# Altium PCB [PCB]-WS2805-RGBCCT-LED-DRV_2025-10-18.pcbdoc (part 2 of 2)
Units mm, origin at the board's own origin, x right, y up, seen from the top; angles counter-clockwise.
Board outline 183.91 x 132.1 mm, 2 copper layers (Top Layer, Bottom Layer); 84 components, 65 nets, 282 pads, 200 vias.
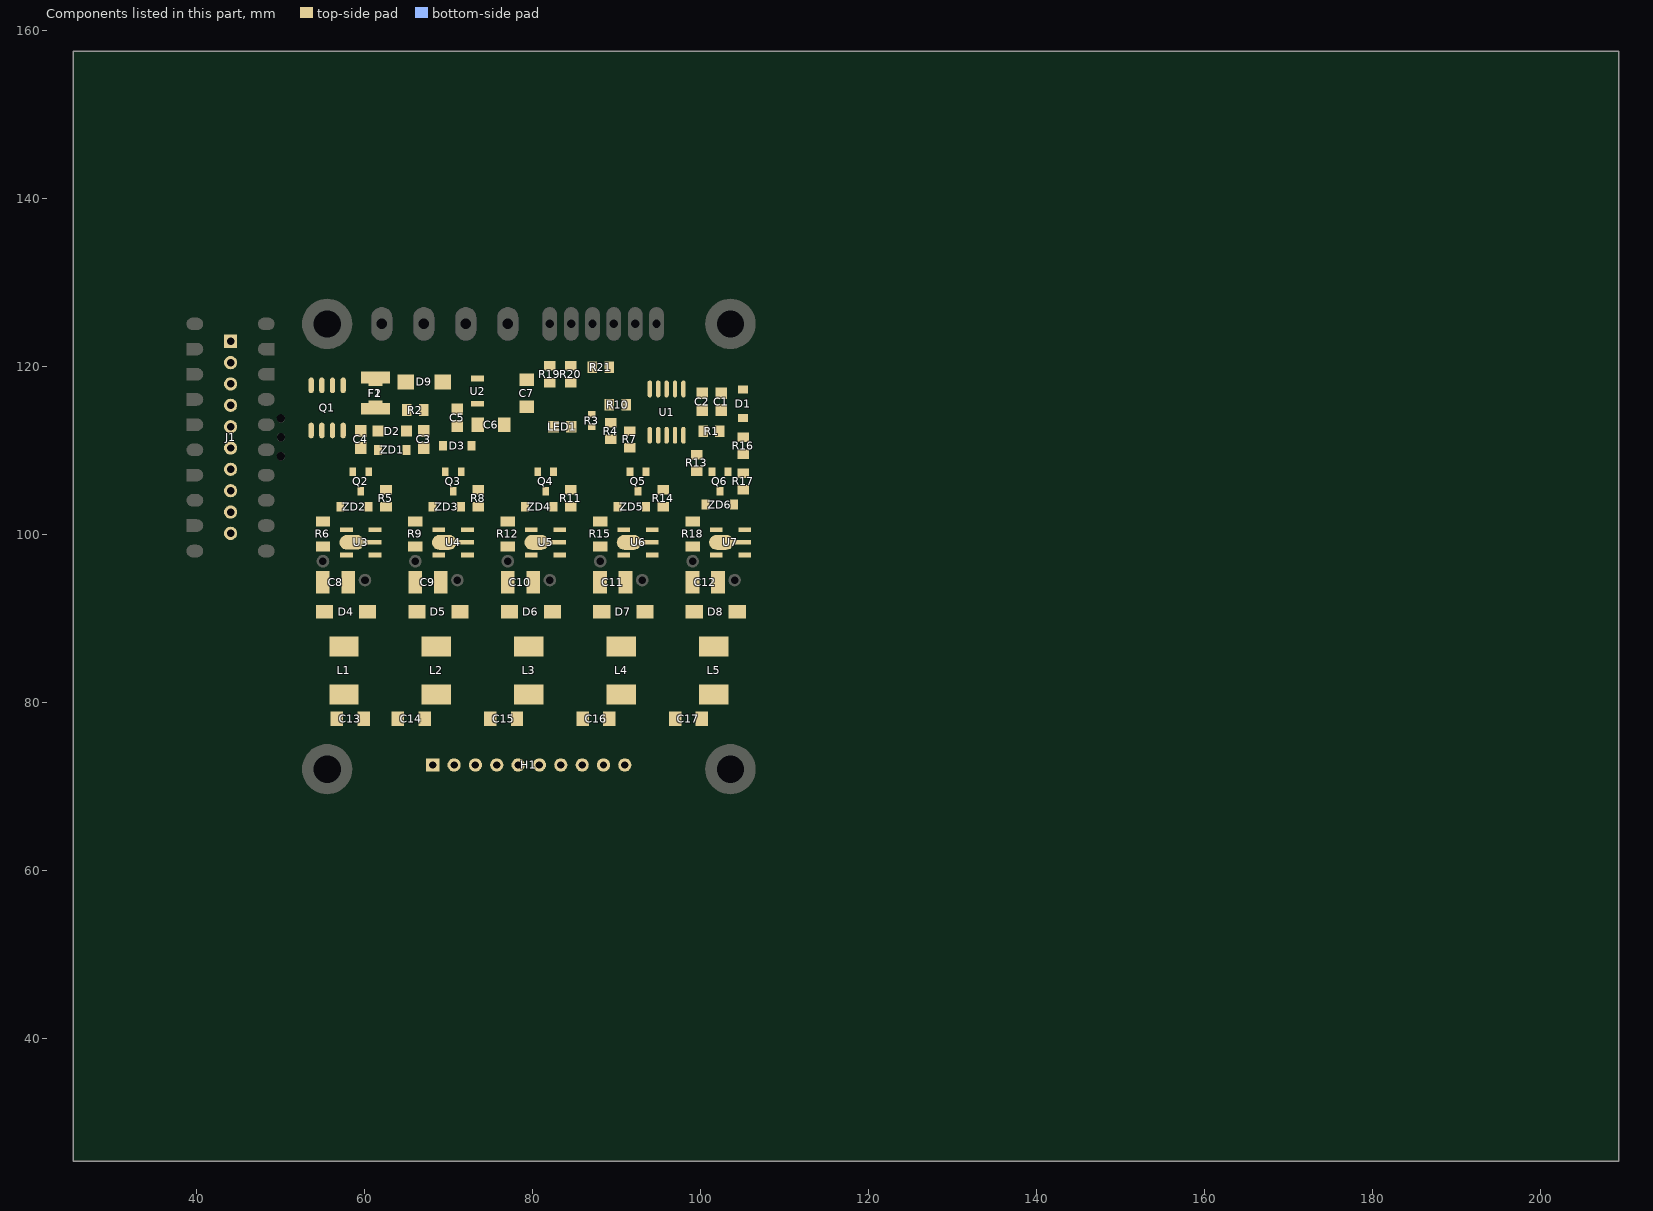
[diagram p2: the components of this part, seen from the top]

## Other copper
Top Layer:
  region net R_PWM: 94.057,110.809 93.738,112.255 93.101,111.693 93.101,110.943
  region net GND: 81.123,99.946 81.122,98.186 82.622,98.565 82.623,99.565
  region net GND: 103.123,99.946 103.122,98.186 104.622,98.565 104.623,99.565
  region net GND: 92.123,99.946 92.122,98.186 93.622,98.565 93.623,99.565
  region net GND: 70.123,99.945 70.122,98.185 71.622,98.565 71.623,99.565
  region net GND: 59.123,98.187 59.122,99.947 60.622,99.567 60.623,98.567
  region net +5V: 95.675,125.442 94.882,123.071 97.175,121.985 97.175,123.399
  region net +5V: 95.675,124.817 94.181,123.323 96.287,123.067 96.287,124.067
  region net DO1: 88.055,123.92 86.305,123.963 86.642,122.454 87.642,122.43
  region net DO1: 88.055,126.192 88.055,123.942 89.72,124.442 89.72,125.692
  region net DO1: 88.845,123.942 88.845,126.192 87.18,125.692 87.18,124.442
  region net C9: 48.104,97.275 48.604,98.775 46.135,100.299 44.254,98.889
  region net C8: 48.101,100.315 48.601,101.815 45.859,103.133 43.87,101.641
  region net C1: 48.602,121.317 48.102,122.817 43.869,121.491 45.858,119.999
  region net C0: 48.604,124.316 48.104,125.816 44.225,124.225 46.114,122.808
  region net C0: 40.1,125.817 39.6,124.317 42.089,122.809 43.978,124.225
  region net C1: 40.102,122.818 39.602,121.318 42.344,120 44.334,121.492
  region net C8: 39.602,101.816 40.102,100.316 44.334,101.642 42.345,103.134
  region net C9: 39.6,98.777 40.1,97.277 43.95,98.889 42.069,100.3
  region net DI2: 85.515,123.942 83.765,123.942 84.14,122.442 85.14,122.442
  region net DI1: 82.975,123.942 81.225,123.942 81.6,122.442 82.6,122.442
  region net B_VCC: 75.75,78.931 74.265,77.203 75.929,76.262 76.746,77.213
  region net R17_1: 105.788,106.751 104.411,107.883 103.895,106.851 104.488,106.363
  region net R17_2: 105.788,104.751 104.411,104.751 104.701,103.251 105.703,103.251
  region net +5V: 105.788,112.133 105.788,111.001 105.801,111.243 105.801,111.993
  region net R14_1: 94.911,105.883 94.911,104.751 93.411,104.706 93.411,105.708
  region net R14_2: 94.911,102.751 94.911,103.883 93.543,103.817 93.543,102.817
  region net W1_PWM: 98.911,108.083 98.911,106.951 97.786,107.092 97.786,107.842
  region net Q4_3: 83.911,105.883 83.911,104.751 82.411,104.707 82.411,105.708
  region net U5_3: 83.911,102.751 83.911,103.883 82.542,103.817 82.542,102.817
  region net B_PWM: 91.766,116.155 90.778,114.778 91.598,114.54 92.085,115.114
  region net +5V: 89.766,114.778 88.634,114.778 88.848,113.317 89.848,113.351
  region net R5_1: 61.911,105.883 61.911,104.751 60.411,104.706 60.411,105.708
  region net R5_2: 61.911,102.751 61.911,103.883 60.543,103.817 60.543,102.817
  region net R_PWM: 90.038,110.751 90.038,111.883 90.788,111.568 90.788,111.068
  region net R_PWM: 88.661,111.883 88.661,110.751 87.536,110.943 87.536,111.693
  region net +5V: 90.038,113.883 88.661,112.751 90.45,112.28 91.314,112.99
  region net +5V: 88.661,113.883 90.038,113.883 89.706,115.383 88.704,115.383
  region net LED1_1: 86.668,112.41 86.668,113.217 85.543,113.192 85.543,112.442
  region net GND: 66.534,114.128 67.666,114.128 67.601,112.628 66.601,112.628
  region net D2_1: 65.618,114.128 64.534,115.505 64.082,114.26 64.552,113.663
  region net C0: 43.315,122.21 44.89,123.784 41.891,125.241 40.32,123.67
  region net C0: 43.315,123.784 44.89,122.21 47.884,123.67 46.313,125.241
  region net D2_1: 61,111.667 61,112.967 59.5,112.816 59.5,111.816
  region net D2_1: 62.3,112.967 61,111.667 62.564,111.11 63.286,111.832
  region net GND: 65.7,112.967 65.7,111.667 67.101,111.816 67.101,112.816
  region net +5V: 104.525,117.734 105.675,117.734 105.6,117.817 104.6,117.817
  region net +5V: 80.214,118.813 78.486,117.667 79.967,116.85 80.805,117.405
  region net GND: 66.425,111.612 66.425,113.022 65.049,112.816 65.049,111.816
  region net GND: 66.425,113.022 67.775,113.022 67.601,114.522 66.601,114.522
  region net U1_10: 99.575,114.112 100.925,114.112 100.751,112.612 99.751,112.612
  region net U1_10: 99.575,115.522 99.575,114.112 98.45,114.443 98.45,115.193
  region net GND: 99.575,116.112 99.575,117.522 98.506,117.192 98.506,116.442
  region net GND: 100.925,117.522 100.925,116.112 102.425,116.317 102.425,117.317
  region net R1_1: 101.825,114.112 103.175,114.112 102.999,112.612 101.999,112.612
  region net GND: 101.825,116.112 101.825,117.522 100.325,117.317 100.325,116.317
  region net R_VCC: 57.5,78.931 56.015,77.203 57.747,75.766 58.727,76.907
  region net R5_2: 61.017,103.892 61.017,102.742 62.517,102.817 62.517,103.817
  region net +5V: 90.911,111.751 92.288,112.883 90.498,113.353 89.634,112.643
  region net W2_PWM: 102.9,107.967 103.7,107.967 103.674,108.544 102.924,108.544
  region net R17_1: 101.95,105.667 102.75,104.667 103.47,105.567 103.002,106.153
  region net R5_1: 59.2,105.667 60,104.667 61.832,104.779 61.062,105.741
  region net R17_2: 104.517,104.142 104.517,102.992 105.183,103.081 105.186,104.081
  region net GND: 100.182,104.142 101.133,102.992 101.435,104.981 100.607,105.983
  region net U4_3: 72.017,103.892 72.017,102.742 73.517,102.817 73.517,103.817
  region net Q3_3: 72.911,105.883 72.911,104.751 71.411,104.707 71.411,105.708
  region net U4_3: 72.911,102.751 72.911,103.883 71.544,103.817 71.544,102.817
  region net W2_GND: 103.35,79.792 99.85,82.142 99.308,80.444 101.25,78.85
  region net W1_GND: 92.35,79.792 88.85,82.142 88.308,80.543 90.249,78.949
  region net B_GND: 81.35,79.792 77.85,81.735 77.486,80.267 79.103,79.055
  region net G_GND: 70.35,79.792 66.85,82.142 66.309,80.444 68.25,78.85
  region net VCC: 68.932,109.992 68.932,111.142 67.703,111.066 67.703,110.066
  region net U5_3: 84.048,100.853 82.547,100.853 82.924,101.978 83.674,101.978
  region net R14_2: 95.048,100.853 93.547,100.853 93.922,101.978 94.672,101.978
  region net U4_3: 73.048,100.852 71.548,100.852 71.923,101.977 72.673,101.977
  region net R5_2: 62.048,100.854 60.548,100.854 60.922,101.979 61.672,101.979
  region net D2_1: 58.925,111.612 58.925,113.022 57.95,112.816 57.95,111.816
  region net D2_1: 60.275,113.022 60.275,111.612 61.65,111.816 61.65,112.816
  region net W1_PWM: 93.95,107.967 93.95,106.967 95.075,107.092 95.075,107.842
  region net R14_1: 92.2,105.667 93,104.667 94.831,104.779 94.062,105.741
  region net Q4_3: 81.2,105.667 82,104.667 83.832,104.779 83.062,105.741
  region net G_PWM: 71.95,107.967 71.95,106.967 73.075,107.191 73.075,107.941
  region net Q3_3: 70.2,105.667 71,104.667 72.832,104.779 72.062,105.741
  region net R14_2: 94.017,103.891 94.017,102.741 95.517,102.817 95.517,103.817
  region net U5_3: 83.017,103.892 83.017,102.742 84.517,102.817 84.517,103.817
  region net VCC: 61.183,109.493 61.183,110.643 59.683,110.568 59.683,109.568
  region net D2_1: 64.568,109.493 65.518,110.643 64.105,111.288 63.465,110.513
  region net U1_7: 88.584,120.604 89.717,119.276 89.895,120.315 89.338,120.827
  region net DO1: 86.584,120.604 87.716,120.604 87.643,122.104 86.643,122.104
  region net U1_8: 85.288,117.501 85.288,118.634 86.413,118.442 86.413,117.692
  region net DI2: 83.911,120.634 85.288,120.634 85.14,122.134 84.14,122.134
  region net U1_9: 81.411,117.501 82.788,117.501 82.475,117.317 81.725,117.317
  region net DI1: 81.411,120.634 82.788,120.634 82.6,122.134 81.6,122.134
  region net GND: 81.899,112.117 81.899,113.517 80.774,113.191 80.774,112.441
  region net LED1_1: 85.3,113.517 85.3,112.117 86.425,112.442 86.425,113.192
  region net GND: 99.92,116.442 99.919,117.192 99.569,117.192 99.57,116.442
  region net GND: 100.581,117.192 100.58,116.442 100.93,116.317 100.931,117.317
  region net GND: 102.169,116.442 102.169,117.192 101.819,117.317 101.819,116.317
  region net +5V: 95.091,123.192 95.091,123.942 95.441,124.067 95.441,123.067
  region net DO1: 87.516,123.237 86.766,123.235 86.641,122.885 87.641,122.887
  region net GND: 103.019,98.69 103.018,99.44 102.668,99.565 102.669,98.565
  region net GND: 103.681,99.44 103.68,98.69 104.03,98.565 104.031,99.565
  region net GND: 102.864,99.44 102.863,98.69 103.213,98.565 103.214,99.565
  region net GND: 105.518,98.69 105.518,99.44 105.167,99.565 105.168,98.565
  region net GND: 105.273,99.44 105.272,98.69 105.622,98.565 105.623,99.565
  region net GND: 104.612,98.69 104.611,99.44 104.261,99.565 104.262,98.565
  region net GND: 92.019,98.69 92.018,99.44 91.668,99.565 91.669,98.565
  region net GND: 92.68,99.44 92.68,98.69 93.029,98.565 93.031,99.565
  region net GND: 91.864,99.44 91.863,98.69 92.213,98.565 92.214,99.565
  region net GND: 94.518,98.69 94.517,99.44 94.167,99.565 94.168,98.565
  region net GND: 94.273,99.44 94.272,98.69 94.622,98.565 94.623,99.565
  region net GND: 93.612,98.69 93.611,99.44 93.261,99.565 93.262,98.565
  region net GND: 81.019,98.69 81.018,99.44 80.668,99.565 80.669,98.565
  region net GND: 81.68,99.44 81.68,98.69 82.03,98.565 82.03,99.565
  region net GND: 80.864,99.44 80.863,98.69 81.213,98.565 81.214,99.565
  region net GND: 83.518,98.69 83.518,99.44 83.167,99.565 83.169,98.565
  region net GND: 83.273,99.44 83.273,98.69 83.622,98.565 83.623,99.565
  region net GND: 82.612,98.69 82.611,99.44 82.261,99.565 82.262,98.565
  region net GND: 70.019,98.69 70.018,99.44 69.668,99.565 69.669,98.565
  region net GND: 70.68,99.44 70.68,98.69 71.03,98.565 71.03,99.565
  region net GND: 69.864,99.44 69.863,98.69 70.213,98.565 70.214,99.565
  region net GND: 72.518,98.69 72.518,99.44 72.167,99.565 72.169,98.565
  region net GND: 71.612,98.69 71.611,99.44 71.261,99.565 71.262,98.565
  region net GND: 72.273,99.44 72.273,98.69 72.623,98.565 72.623,99.565
  region net GND: 61.518,99.442 61.518,98.692 61.168,98.567 61.168,99.567
  region net GND: 61.273,98.692 61.273,99.442 61.623,99.567 61.623,98.567
  region net GND: 60.612,99.442 60.611,98.692 60.261,98.567 60.262,99.567
  region net GND: 59.931,98.692 59.931,99.442 60.28,99.567 60.281,98.567
  region net DI1: 82.475,123.236 81.725,123.236 81.6,122.886 82.6,122.886
  region net DI2: 85.015,123.236 84.265,123.236 84.14,122.886 85.14,122.886
  region net +5V: 94.761,124.443 95.424,125.106 95.755,124.819 95.048,124.111
  region net DO1: 89.307,124.598 89.306,125.536 88.869,125.692 88.869,124.442
  region net DO1: 87.593,124.598 87.593,125.535 88.031,125.692 88.031,124.442
  region net R_VCC: 81.45,72.034 80.269,72.058 80.225,71.58 81.475,71.555
  region net W1_VCC: 89.085,73.082 87.904,73.093 87.75,73.646 89.25,73.632
  region net C9: 38.85,98.777 39.85,98.777 39.85,97.277 38.85,97.277
  region net C7: 38.852,104.816 39.852,104.816 39.852,103.316 38.852,103.316
  region net C5: 38.852,110.816 39.852,110.816 39.852,109.316 38.852,109.316
  region net C0: 38.85,125.817 39.85,125.817 39.85,124.317 38.85,124.317
  region net C0: 49.354,125.816 48.354,125.816 48.354,124.316 49.354,124.316
  region net C3: 49.352,116.816 48.352,116.816 48.352,115.317 49.352,115.317
  region net C5: 49.352,110.815 48.352,110.815 48.352,109.315 49.352,109.315
  region net C4: 49.352,113.816 48.352,113.816 48.352,112.315 49.352,112.315
  region net C7: 49.352,104.815 48.352,104.815 48.352,103.315 49.352,103.315
  region net C6: 49.352,107.815 48.352,107.815 48.352,106.315 49.352,106.315
  region net C8: 49.352,101.815 48.351,101.815 48.351,100.315 49.352,100.315
  region net C9: 49.354,98.776 48.354,98.776 48.354,97.276 49.354,97.276
Bottom Layer:
  region net +5V: 95.675,123.942 93.925,123.942 93.925,122.166 95.675,122.166
  region net +5V: 95.675,123.942 93.925,123.942 93.925,122.768 95.675,122.768

## Silkscreen, mask and mechanical layers (free items; w line width, h text height)
Top Overlay:
  circle w0.3: c74.6,125.067 r0.906
  circle w0.3: c64.6,125.067 r0.906
  lines w0.2: 94.85,81.217 97.35,81.217
  lines w0.3: 59.85,71.567 ccw(c60.85,71.567) 60.85,70.567 ; 59.85,74.817 cw(c60.85,74.817) 60.85,75.817 ; 64.1,125.067 65.191,125.067 65.1,125.067 ; 64.599,70.566 ccw(c64.599,71.566) 65.599,71.566 ; 64.6,75.817 cw(c64.6,74.817) 65.6,74.817 ; 64.6,124.567 64.6,125.567 ; 74.138,125.067 75.087,125.067
  lines w0.3 net S$73555: 59.85,71.567 59.85,74.818 ; 60.85,70.567 64.6,70.567 ; 60.927,75.817 64.677,75.817 ; 65.599,71.566 65.6,74.817
  lines w0.6: 59.4,123.317 59.4,126.817 ; 79.8,123.317 79.8,126.817 ; 97.1,123.317 97.1,126.817
  text "GND" at 91.6,122.817 h1.75 r270
  text "5vO" at 94.1,122.817 h1.75 r270
  text "D1" at 82.85,122.717 h1.75 r181
  text "D2" at 85.55,122.702 h1.75 r181
  text "O1" at 88.1,122.717 h1.75 r180
  text "O2" at 90.8,122.717 h1.75 r181
  text "12~24" at 71.705,122.657 h1.5 r180
  text "VCC" at 67.71,122.433 h3.25 r180
  text "GND" at 77.71,122.435 h3.25 r180
  text "1.5A" at 57.6,121.317 h1.25 r3
  text "DC" at 70.505,121.267 h1.5 r180
  text "5v" at 77.1,119.567 h1.25 r265
  text "104 x 2" at 99.26,119.553 h1.25
  text "PMOS" at 54.1,119.067 h1.25
  text "47" at 86.25,117.807 h1.25
  text "R" at 86.647,116.807 h1.25 r180
  text "107" at 78.35,116.317 h1.25 r359
  text "PWR" at 81.85,114.317 h1.75
  text "106" at 74.6,114.067 h1.25 r270
  text "4b686f61's" at 73.66,110.427 h1.25
  text "WS2805" at 93.6,109.567 h1.25
  text "104" at 56.35,108.817 h1.25
  text "10v" at 64.349,108.817 h1.25 r270
  text "103 x 5" at 107.35,108.817 h1.25 r90
  text "RGBCCT Driver" at 73.6,108.317 h2.5
  text "x4" at 56.35,107.817 h1.25 r15
  text "702/" at 66.1,106.817 h1.25 r359
  text "102" at 86.1,106.566 h1.25
  text "J3Y" at 66.1,105.567 h1.25
  text "x5" at 86.1,105.317 h1.25 r2
  text "5v1" at 76.24,104.037 h1.25
  text "102 x 5" at 107.35,103.817 h1.25 r90
  text "2024.07.07" at 51.85,87.317 h2.25 r270
  text "⚠" at 95.276,85.067 h2 r210
  text "47~" at 89.05,83.967 h1.75
  text "BEEP" at 55.6,83.317 h2
  text "ESD" at 94.85,83.317 h1
  text "BOP" at 66.85,83.067 h2
  text "0650" at 77.1,83.067 h2
  text "68uh" at 88.7,82.467 h1.75
  text "PBF" at 94.85,81.067 h1
  text "Never gonna Give you up" at 63.1,80.317 h1.5 r90
  text "Never gonna let you down" at 74.1,80.317 h1.5 r90
  text "8 modules since 2023.05.04" at 107.1,75.817 h1.75 r90
  text "⏚" at 102.35,75.567 h3 r139
  text "The ENDGAME LED Driver" at 66.85,74.567 h2.25
  text "v1r11" at 60.482,73.317 h2
  text "Gen5" at 60.483,71.569 h2
  text "W-" at 67.259,69.654 h1.5 r1
  text "C-" at 69.918,69.65 h1.5 r338
  text "B-" at 72.429,69.658 h1.5
  text "G-" at 74.999,69.658 h1.5 r338
  text "R-" at 77.599,69.654 h1.5
  text "R+" at 80.099,69.655 h1.5
  text "G+" at 82.549,69.658 h1.5 r353
  text "B+" at 85.349,69.658 h1.5
  text "C-" at 87.739,69.651 h1.5 r338
  text "W-" at 90.219,69.654 h1.5
  text "12~24v" at 60.6,68.817 h1.25
  text "INDEV" at 94.1,68.317 h1.75
Bottom Overlay:
  rectangle: 67.1,87.817 95.6,92.817
  circle w0.3: c66.868,105.881 r2.63
  lines w0.3: 59.6,119.417 79.35,119.417 79.35,128.042 59.6,128.042 59.6,119.417
  lines w0.3 net S$23297: 65.127,103.921 68.607,107.741
  lines w0.3 net S$242274: 105.1,83.442 105.1,85.892
  lines w0.3 net S$73311: 56.35,96.192 58.85,94.942 ; 67.35,96.192 69.85,94.942 ; 78.35,96.192 80.85,94.942 ; 89.35,96.192 91.85,94.942 ; 100.35,96.192 102.85,94.942
  lines w0.5: 67.1,87.817 105.1,87.817 105.1,92.817 67.1,92.817 67.1,87.817
  text "JLCJLCJLCJLC" at 93.1,127.617 h0.9
  text "12~24" at 67.6,122.667 h1.5 r180
  text "5mm" at 59.1,122.567 h1.75 r90
  text "GND" at 71.74,122.567 h3.25 r180
  text "2.54mm" at 81.1,122.567 h1.75 r180
  text "100mA" at 90.85,122.567 h1.75 r180
  text "VCC" at 61.23,122.465 h3.25 r180
  text "DC" at 68.71,121.367 h1.5 r180
  text "5v" at 92.35,120.817 h1.75 r185
  text "47R x 3" at 87.6,119.317 h1.25
  text "(470)" at 87.003,118.067 h1.25
  text "DO NOT TEST" at 79.54,117.817 h1.25
  text "1.5A (24v)" at 64.35,117.067 h1.25
  text "POLARITY PROTECTION" at 79.6,116.567 h1.25
  text "3A (12v)" at 63.6,115.567 h1.25
  text "100nF" at 103.03,115.357 h1.25 r1
  text "4007" at 106.669,115.067 h1.25
  text "78L05" at 76.95,115.047 h1.25
  text "100uF" at 81.1,114.567 h1.25
  text "100K" at 67.6,114.317 h1.25
  text "224" at 88.1,114.317 h1.25
  text "100nF" at 72.6,114.067 h1.25
  text "x 2" at 102.35,114.067 h1.25 r359
  text "PPTC" at 62.85,113.317 h1.25
  text "10K" at 91.35,113.317 h1.25 r1
  text "HXY4435S" at 58.6,113.067 h1.25
  text "BLUE" at 85.1,113.067 h1.25
  text "220K" at 88.35,113.067 h1.25 r1
  text "10uF" at 76.35,112.567 h1.25 r1
  text "4148" at 64.85,111.817 h1.25
  text "x 3" at 91.1,111.817 h1.25 r358
  text "47R" at 102.6,111.817 h1.25 r1
  text "100nF" at 61.1,110.817 h1.25 r1
  text "100nF" at 68.6,110.817 h1.25 r1
  text "10K" at 106.1,110.067 h1.25 r1
  text "10-15v" at 65.35,109.567 h1.25
  text "4b686f61 - 5th Gen" at 94.1,108.067 h2.5
  text "10K" at 100.6,108.067 h1.25 r1
  text "7002/" at 103.1,106.567 h1.25
  text "10K" at 106.1,105.816 h1.25 r1
  text "Engineering/Lighting" at 94.1,105.567 h2.5
  text "S8050 x 5" at 103.1,105.317 h1.25
  text "1K" at 96.6,104.567 h1.25 r358
  text "Pb" at 68.35,103.817 h2
  text "ZD 5v1" at 104.35,103.817 h1.25
  text "x 5" at 96.6,103.317 h1.25 r359
  text "2024.07.07 09:52:33 v1r11" at 94.1,103.067 h2
  text "x 5" at 103.35,102.567 h1.25 r359
  text "Power Contact Borad" at 46.713,102.151 h2 r270
  text "0805 parts do not tombstone and are easier to place." at 94.1,101.317 h1.25
  text "250mR" at 56.851,100.067 h1.25
  text "2024.06.21 v1r9 (RGBCCT)" at 40.322,99.435 h2 r270
  text "x 5" at 55.85,98.817 h1.25 r359
  text "PT4115 x 5" at 101.3,98.067 h1.25
  text "+" at 54.1,96.067 h2 r42
  text "+" at 65.1,96.067 h2 r42
  text "+" at 76.1,96.067 h2 r42
  text "+" at 87.1,96.067 h2 r42
  text "+" at 98.1,96.067 h2 r42
  text "47~220uF" at 74.849,95.818 h1.25
  text "Use 220uF" at 85.849,95.817 h1.25
  text "C1210" at 63.85,95.567 h1.25
  text "x 5" at 74.849,94.567 h1.25 r359
  text "x 5" at 64.099,94.317 h1.25 r359
  text "35v" at 85.85,94.317 h1.25
  text "10-22uF" at 65.849,93.067 h1.25
  text "SS34 x 5 or" at 64.1,91.067 h1.25
  text "SBR3A40SA-13" at 65.1,89.567 h1.25
  text "DATE" at 104.35,89.067 h3.5
  text "33-68uH x 5" at 72.1,84.817 h1.25
  text "Require min 470uf on input" at 104.35,84.817 h1.5
  text "Use 68uH" at 71.35,83.317 h1.25
  text "TVS diode or MOV optional (outdoor use)" at 104.35,83.317 h1.5
  text "Stack mount" at 84.85,78.817 h2
  text "2.2uF x 5" at 60.85,78.317 h1.25
  text "or 1uf" at 60.1,77.067 h1.25
  text "The ENDGAME LED Driver" at 92.35,76.567 h2.25
  text "GND" at 106.6,75.817 h2
  text "Font: Jua / Rounded and balanced" at 52.1,75.567 h1.25 r270
  text "⏚" at 102.85,75.317 h3 r41
  text "With RGBCCT 5 Channel" at 91.335,74.417 h2.25
Top Solder:
  region net VCC: 55.1,111.067 55.35,110.817 55.35,103.817 55.1,103.567 52.1,103.567 51.85,103.817 51.85,110.817 52.1,111.067 55.1,111.067
  region: 57.85,116.317 57.85,114.567 53.35,114.567 53.35,116.317
Document:
  lines w0.254: 79.595,68.567 79.598,83.567 ; 80.86,68.567 80.87,72.567
  text "⬆" at 78.69,66.567 h2.03 r139
  text "4mm" at 76.393,63.257 h2.03 r353
  text "v1r4 2024.06.08 RGBCCT WS2805 PT4115 Over Engineered LED DRIVER" at 116.1,57.3 h2.03
  text "ROUGH LAYOUT" at 81.1,54.801 h2.03
  text "led-drv_v1r9_" at 55.35,53.567 h2.5
  text "Code Name: End Game RGBCCT LED Driver" at 116.6,47.801 h2.03
  text "Color Order: -WCBGR +RGBCW" at 116.348,42.9 h2.03
  text "DIM pin to be on the same layer. / Use the capaictor pins to cheat off some vias." at 116.343,38.1 h2.03